# Altium PCB wenyaPCB.PcbDoc
Units mil, origin at the board's own origin, x right, y up, seen from the top; angles counter-clockwise.
Board outline 5529.59 x 3881.03 mil, 2 copper layers (Top Layer, Bottom Layer); 13 components, 15 nets, 63 pads, 79 vias.
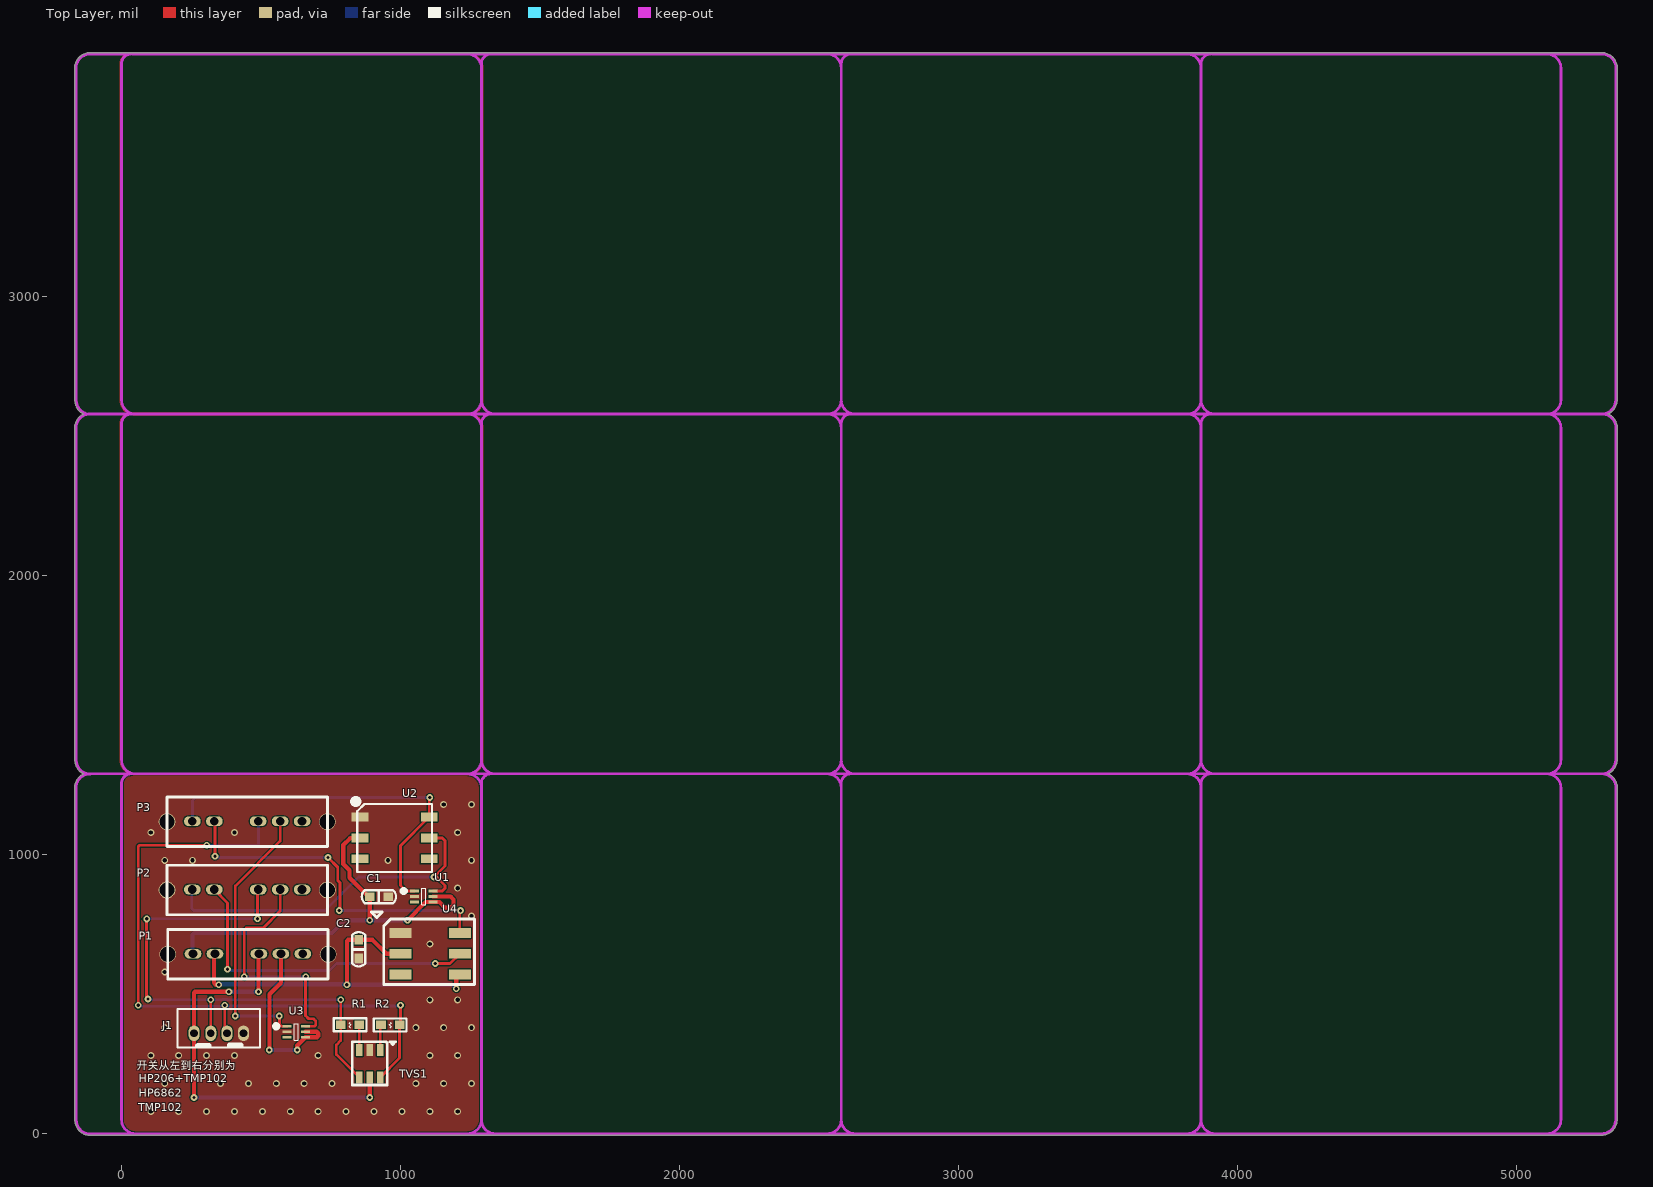
[diagram p0: Top Layer view]
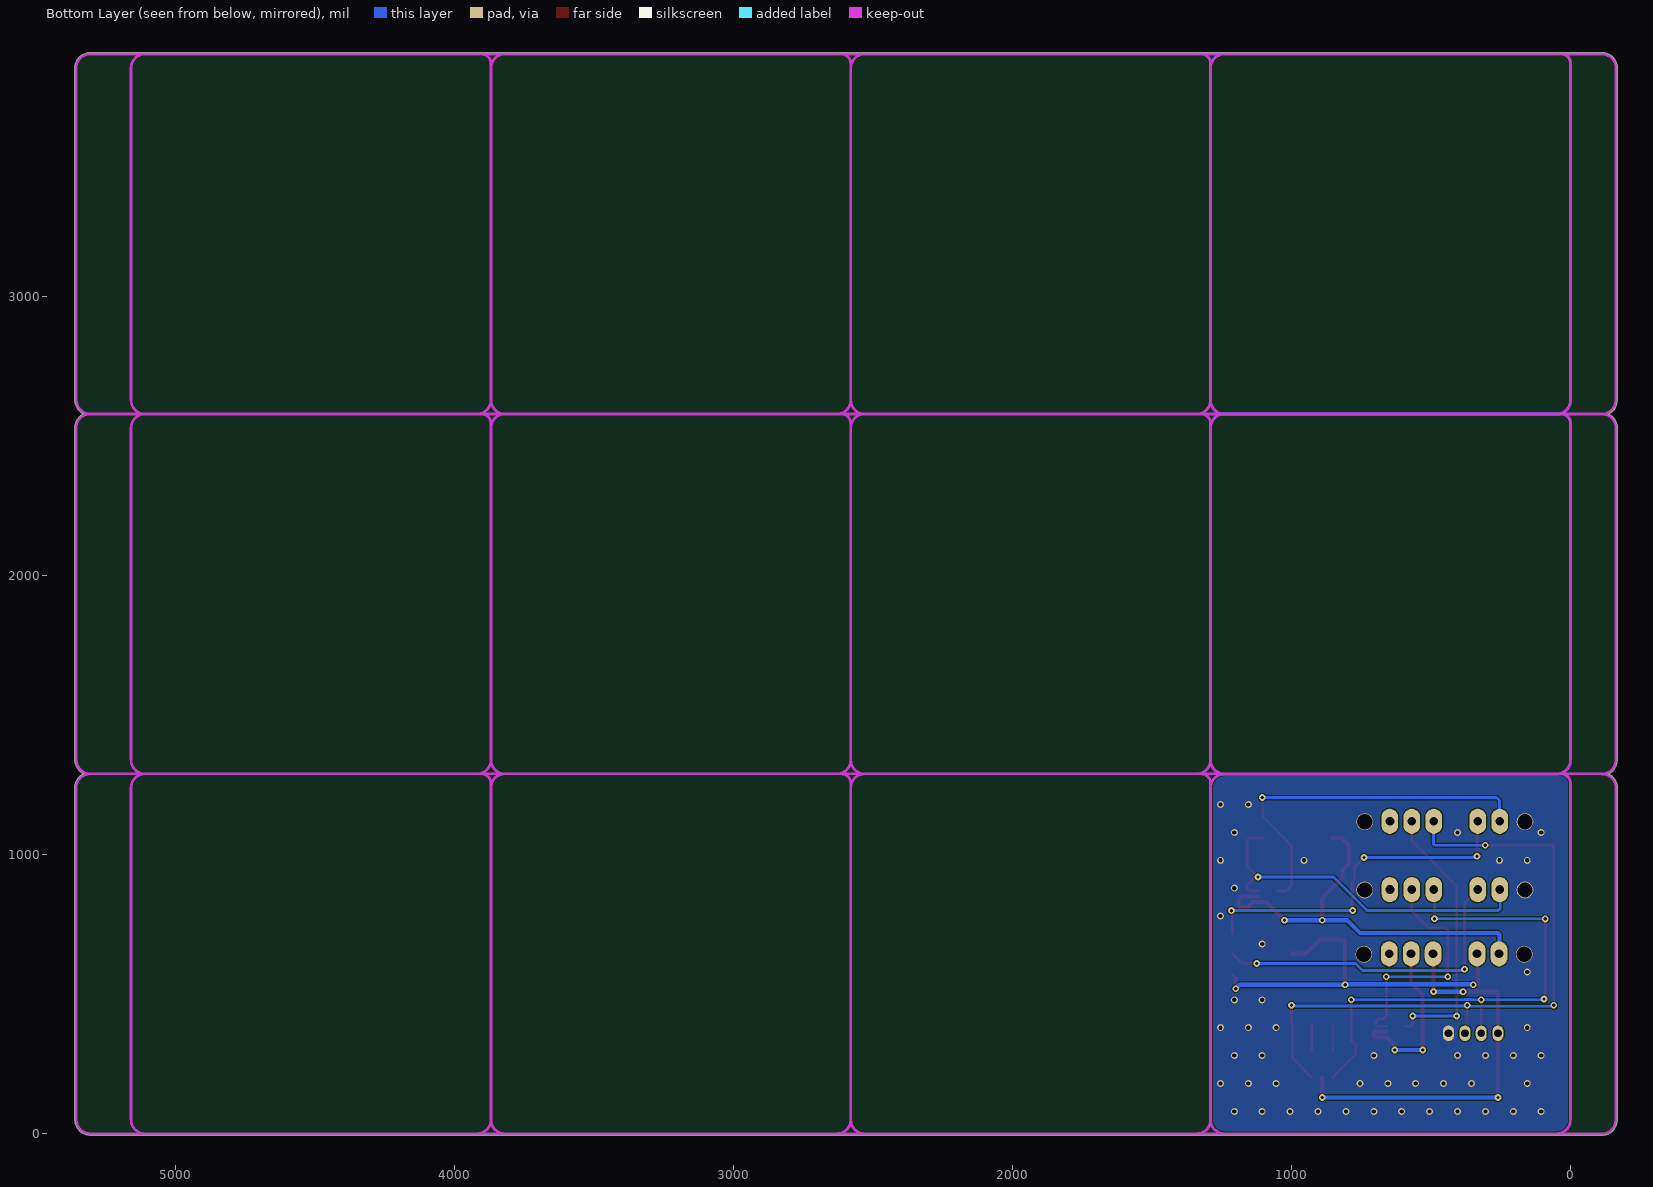
[diagram p1: Bottom Layer view, seen from below]

## Layer stack, top to bottom
Top Solder: solder mask 0.4, Solder Resist, Dk 3.5
Top Layer: signal copper 1.4
Dielectric 1: dielectric 12.6, FR-4, Dk 4.8
Bottom Layer: signal copper 1.4
Bottom Solder: solder mask 0.4, Solder Resist, Dk 3.5

## Board outline
-167.72,49 -167.72,1240 cw(c-162.71,1240) -167.72,1240.09 cw(c-112.71,1240) -136.36,1289.67 cw(c-112,1339) -166.95,1336.32 cw(c-162.71,1339) -167.72,1339 -167.72,2530 cw(c-162.71,2530) -167.72,2530.09 cw(c-112.71,2530) -136.36,2579.67 cw(c-112,2629) -166.95,2626.32 cw(c-162.71,2629) -167.72,2629 -167.72,3820 cw(c-162.71,3820) -167.72,3820.09 cw(c-112.71,3820) -112.71,3875.01 34.14,3875.01 cw(c34.14,3870) 37.07,3874.07 cw(c40,3870) 40,3875.01 1240,3875.01 cw(c1240,3870) 1240.06,3875.01 2530,3875.01 cw(c2530,3870) 2530.1,3875.01 3820,3875.01 cw(c3820,3870) 3820.08,3875.01 3904.14,3875.01 cw(c3904.14,3870) 3907.07,3874.07 cw(c3910,3870) 3910,3875.01 5306.7,3875.01 cw(c5306.85,3870) 5306.85,3875.01 cw(c5306.85,3820) 5361.86,3820 5361.86,2630 cw(c5356.85,2630) 5360.94,2627.09 cw(c5306,2630) 5329.37,2580.19 cw(c5306.85,2530) 5361.86,2530 5361.86,1340 cw(c5356.85,1340) 5360.94,1337.09 cw(c5306,1340) 5329.37,1290.19 cw(c5306.85,1240) 5361.86,1240 5361.86,50 cw(c5356.85,50) 5360.94,47.09 cw(c5306,50) 5306,-5.02 5110,-5.02 ccw(c5110,0) 5110.1,-5.02 5110,-5.02 ccw(c5110,50) 5110.33,-5.02 5110,-5.02 3920,-5.02 cw(c3920,0) 3919.9,-5.02 cw(c3920,0) 3919.89,-5.02 ccw(c3920,50) 3920,-5.02 2630,-5.02 cw(c2630,0) 2629.9,-5.02 cw(c2630,0) 2629.89,-5.02 ccw(c2630,50) 2630,-5.02 1340,-5.02 cw(c1340,0) 1339.94,-5.02 cw(c1340,0) 1339.9,-5.01 ccw(c1340,50) 1340,-5.01 1340,-5.02 ccw(c1340,0) 1340,-5.02 50,-5.02 cw(c50,0) 49.9,-5.01 cw(c50,0) 49.9,-5.01 ccw(c50,50) 50,-5.01 -108.99,-5.01 cw(c-112,-1) -112,-6.02 cw(c-112,49) -166.95,46.32 cw(c-162.71,49)

## Design rules (kind name [scope] priority, off if disabled: settings)
Clearance [All] p1: gap=4 ignorepadtopadclearanceinfootprint=TRUE
MinimumSolderMaskSliver [All] p1: minsoldermaskwidth=1
PlaneClearance [All] p1: clearance=8
PlaneConnect [All] p1: planeconnectstyle=Direct reliefexpansion=20 reliefentries=4 reliefconductorwidth=10 reliefairgap=10
PolygonConnect [All] p1: connectstyle=Direct reliefconductorwidth=10 reliefentries=4 polygonreliefangle="90 Angle" airgapwidth=10
RoutingVias [All] p1: holewidth=12 width=24 viastyle="Through Hole" minholewidth=12 minwidth=24 maxholewidth=12 maxwidth=24
SilkToSilkClearance [All] p1: silktosilkclearance=2
SilkToSolderMaskClearance [IsPad] p1: minsilkscreentomaskgap=0 clearancetoexposedcopper=TRUE
SolderMaskExpansion [IsVia] p1: expansion=4
Width vcc [InNet('VCC')] p1: maxlimit=15 minlimit=15 preferedwidth=15
Width [All] p2: maxlimit=15 minlimit=10 preferedwidth=10
25 further rules are at their usual default settings.

## Classes and differential pairs
component class wx: C1 C2 J1 P1 P3 R1 R2 TVS1 U1 U2 U3 U4

## Components (designator, comment, footprint, x,y, rotation, side; value= is the part's Value field where it differs from the comment)
C1 "0.1u" C0603 890,850 r0 top
C2 "100nF/50V" CAP0603 850,628.49 r90 top
J1 "Header 4" HDX4-L 348.74,360 r90 top
P1 "SS-14D07G2" "PCBComponent_1 - duplicate" 740.55,555 r90 top
P2 "SS-14D07G2" "PCBComponent_1 - duplicate" 738.03,785 r90 top
P3 "SS-14D07G2" "PCBComponent_1 - duplicate" 738.03,1030 r90 top
R1 "1K 5%" RES0603 852.6,390 r180 top
R2 "1K 5%" RES0603 930,390 r0 top
TVS1 "TVS" ESD 927.4,300 r180 top
U1 "tmp102" SO-P6 1051.97,869.68 r0 top
U2 "." HP206C 978.94,1060.2 r0 top
U3 "tmp102" SO-P6 595,385 r0 top
U4 "HP6862I" huapu 1106.3,645.2 r270 top

## Footprints (in the part's own frame and the unit in brackets; to place one, negate y for a bottom-side part, rotate by r counter-clockwise, add the part's x,y. Pads: shape width x height; smd on the part's side, far side on the other; paste and mask are expansions set on the pad)
C0603 [mil]
  rect 35x31 smd: 1(-0.49,0) 2(66.51,0)
  silkscreen extent -29,-24 94,23, body extent 1,-15 72,15, height 20
CAP0603 [mil]
  rect 35x31 smd: 1(-0.49,0) 2(66.51,0)
  silkscreen extent -29,-24 94,23, body extent 1,-15 72,15, height 20
ESD [mm]
  rect 0.6x1.1 smd: 1(0,0) 2(0.95,0) 3(1.9,0) 4(1.9,2.5) 5(0.95,2.5) 6(0,2.5)
  silkscreen extent -1.4,-0.76 2.54,3.18
HDX4-L [mm]
  oval 1.4x1 hole 0.7: 1(0,-2.25) 2(0,-0.75) 3(0,0.73) 4(0,2.25)
  silkscreen extent -1.3,-3.75 2.2,3.75
HP206C [mm]
  rect 1.52x0.8 smd: 1(-3.148,1.9) 2(-3.148,0) 3(-3.148,-1.9) 4(3.148,-1.9) 5(3.148,0) 6(3.148,1.9)
  silkscreen extent -3.56,-3.1 3.4,3.3
huapu [mm]
  rect 0.9x2 smd: 1(-1.9,-2.7) 2(0,-2.7) 3(1.9,-2.7) 4(1.9,2.7) 5(0,2.7) 6(-1.9,2.7)
  silkscreen extent -3.8,-5.37 2.8,4.03
"PCBComponent_1 - duplicate" [mil]
  oval 35x60 / inner round 60 / far side oval 90x60 hole 31.5: 1(90,484.25) 2(90,405.51) 3(90,248.03) 4(90,169.29) 5(90,90.55)
  round 60 hole 55.12: 6(88.58,574.8) 7(88.58,0)
  silkscreen extent 0,0 177,575
RES0603 [mil]
  rect 35x31 smd: 1(0,0) 2(67,0)
  silkscreen extent -26,-24 92,23, body extent 0,-15 71,15, height 12
SO-P6 [mm]
  rect 0.8x0.25 smd: 1(-0.05,0) 2(-0.05,-0.5) 3(-0.05,-1) 4(1.65,-1) 5(1.65,-0.5) 6(1.65,0)
  silkscreen extent -1.04,-1.25 0.98,0.25

## Part data
C1: library part CAP, "Capacitor"
C2: library part 101020103-0021, "104pF,50 V,±10%,0603,国巨,CC0603KRX7R9BB104", Part Name=0603贴片电容, ID=3, Part Number=101020103-0021, SMD/DIP=SMD
J1: "Header, 4-Pin", LatestRevisionDate=17-Jul-2002, LatestRevisionNote="Re-released for DXP Platform.", Publisher="Altium Limited"
R1 R2: library part 101010103-0008, "1K,±5%,1/10W,0603,国巨,RC0603JR-071KL", Part Name=0603贴片电阻, ID=10, Part Number=101010103-0008, SMD/DIP=SMD
U1 U3: library part tem102
U2: library part HP206C

## Via types
v1: diameter 25, hole 15, Top Layer to Bottom Layer, tented both sides, 47 vias
v2: diameter 24, hole 12, Top Layer to Bottom Layer, tented both sides, 32 vias

## Nets (pads, with @x,y where several pads share a name; then routed paths per layer and width w, separated by ;. In a path a pad name is that pad's centre, name@x,y a point inside that pad or via, vN(x,y) a via of type N, cw(c..) or ccw(c..) an arc to the next point about the centre after c; other vN are vias at no path point)
GND: C1.2 C2.1 J1.1 P1.6 P1.7 P2.6 P2.7 P3.6 P3.7 TVS1.2 U1.2 U2.1 U3.2 U4.1
  other v1: 105,80 205,80 305,80 405,80 505,80 605,80 705,80 805,80 905,80 1005,80 1105,80 1205,80 155,180 355,180 455,180 555,180 655,180 755,180 1055,180 1155,180 1255,180 105,280 205,280 305,280 405,280 705,280 1105,280 1205,280 155,380 1055,380 1155,380 1255,380 1105,480 1205,480 155,580 1105,680 1255,780 1205,880 155,980 255,980 955,980 1255,980 105,1080 405,1080 1205,1080 1155,1180 1255,1180
HP_POW: C2.2 P1.2 U4.2 U4.4 | length 1412.3
  Top Layer w10: P1.2@330,639.96 P1.2 ; U4.4@1200,557.8 U4.4
  Top Layer w15: P1.2@330,639.96 331,638.96 331,541 338,534 v2(349,534) ; v2(808,534) 808,691 812,695 C2.2 900,695 949.8,645.2 U4.2 ; v2(1200,520) U4.4@1200,557.8
  Bottom Layer w15: v2(349,534) 350.5,535.5 806.5,535.5 v2(808,534) 1186,534 v2(1200,520)
NetR1_1: R1.1 TVS1.3 | length 90
  Top Layer w10: TVS1.3 R1.1
NetR2_1: R2.1 TVS1.1 | length 91.1
  Top Layer w10: TVS1.1 927.4,387.4 R2.1
POW1: P1.4 U3.4 U3.5 | length 624.2
  Top Layer w15: v2(530,300) 530,500 571.26,541.26 P1.4 ; v2(630,300) 630,315.67 U3.4 700.63,345.63 705,350 705,360 699.68,365.32 U3.5
  Bottom Layer w15: v2(530,300) v2(630,300)
SCL: J1.2 P3.3 R2.2 TVS1.6 | length 2422.7
  Top Layer w10: v2(60,460) 60,1029 65,1034 v2(306,1034) ; v2(370,460) 370,368.27 J1.2 ; TVS1.6 997,271.17 R2.2 1000,393 v2(1000,460)
  Bottom Layer w10: v2(60,460) 63,457 367,457 v2(370,460) 372.6,457.4 997.4,457.4 v2(1000,460) ; v2(306,1034) 487,1034 491,1038 491,1119 P3.3
SCL1: P3.2 U4.6 | length 1258.1
  Top Layer w10: P3.2 335,1117.52 v2(335,995) ; v2(740,990) 775,955 775,907.78 783.03,899.75 783.03,803.03 v2(780,800) ; U4.6 1212.6,797.4 v2(1215,799.8)
  Bottom Layer w10: v2(335,995) 340,990 v2(740,990) ; v2(780,800) 780.2,799.8 v2(1215,799.8)
SCL2: P3.4 U3.1 | length 986.2
  Top Layer w10: v2(408,422) 408,888 568.74,1048.74 P3.4 ; v2@566,425 v2(566,422) 566,393 574,385 U3.1
  Bottom Layer w10: v2(408,422) 563,422 v2@566,425
SDA: J1.3 P2.3 R1.2 TVS1.4 | length 1931.3
  Top Layer w10: v2(90,770) 90,484 91,483 v2(95,483) ; J1.3 v2(320,480) ; v2(487.22,770.22) 487.22,872.22 P2.3 ; v2(785.6,480.4) R1.2 785.6,333.6 770,318 770,284.17 TVS1.4
  Bottom Layer w10: v2@90.22,770.22 v2(487.22,770.22) ; v2(95,483) 95,481 96,480 v2(320,480) ; v2@322,481 322.6,480.4 360.7,480.4 361.3,481 378.7,481 379.3,480.4 v2(785.6,480.4) ; P2.3 P2.3@494,871
SDA1: P2.2 U4.5 | length 1164.6
  Top Layer w10: P2.2 380.04,827.48 v2(380,590) v2(380,590) ; v2(1125,610) 1177.4,610 U4.5
  Bottom Layer w10: v2(380,590) 385,585 456.72,585 457.01,585.3 473.58,585.3 473.88,585 745.61,585 770.61,610 v2(1125,610)
SDA2: P2.4 U3.6 | length 856.4
  Top Layer w10: v2(440,563) 440,730 448,738 508,738 568.74,798.74 P2.4 ; U3.6 691,385 696,390 696,404 688.01,411.99 671.18,411.99 660,423.17 v2(660,563)
  Bottom Layer w10: v2(440,563) v2(660,563)
VCC: J1.4 P1.3 TVS1.5 | length 1447.3
  Top Layer w15: v2(260,130) 260,359.84 J1.4 260.16,505.16 264,509 v2(385,509) ; v2(491,509) 491,643.48 P1.3 ; v2(890,130) TVS1.5
  Bottom Layer w15: v2(260,130) v2(890,130) ; v2@386,510 v2(385,509) v2(491,509)
WY_CLK: P3.1 U1.1 U2.6 | length 1346.6
  Top Layer w10: U1.1 1020.32,869.68 1000,890 1000,1032.13 U2.6 1102.87,1202.87 v2(1105,1205)
  Bottom Layer w10: P3.1 254,1120.22 254,1194 265,1205 v2(1105,1205)
WY_POW: C1.1 P1.1 U1.4 U1.5 U2.2 | length 1557.9
  Top Layer w10: C1.1 890,849.51 C1.1@890,845
  Top Layer w15: P1.1 P1.1@260,641.3 ; U2.2 820.2,1060.2 795,1035 795,966.82 817.5,944.32 817.5,917.5 890,845 v2(890,765) ; v2(1025,765) 1090.31,830.31 U1.4 1139.69,830.31 1160,810 1180,810 1190,820 1190,840 1180,850 U1.5
  Bottom Layer w15: P1.1@260,641.3 P1.1 255,646.3 255,714 261,720 755,720 800,765 v2(890,765) v2(1025,765)
WY_SDA: P2.1 U1.6 U2.5 | length 1307
  Top Layer w10: U2.5 1149.8,1060.2 1160,1050 1160,960 v2(1120,920) 1130,920 1160,890 1160,880 1149.68,869.68 U1.6
  Bottom Layer w10: P2.1 252,873.22 252,807 259,800 730,800 850,920 v2(1120,920)
pads on no net: P1.5 P2.5 P3.5 U1.3 U2.3 U2.4 U3.3 U4.3

## Polygon pours and split planes (outlines as drawn)
GND on Top Layer "Top Layer-No Net" (solid, remove dead copper, pour order 0): -5.02,50 -5.02,1255.86 cw(c0,1255.86) -5.01,1255.94 cw(c34.14,1255.86) 34.14,1295.01 cw(c34.14,1290) 37.07,1294.07 cw(c40,1290) 40,1295.01 1240,1295.01 cw(c1240,1240) 1295.01,1240 1295.01,50 cw(c1290,50) 1295.01,49.92 ccw(c1240.01,50.03) 1295.01,50 1295.01,49.92 cw(c1240,50) 1240,-5.02 50,-5.02 cw(c50,0) 49.9,-5.01 ccw(c50,49.98) 50,-5.01 49.9,-5.01 cw(c50,50)
no net on Top Layer "Top Layer-No Net" (solid, remove dead copper, pour order 6): -5.01,1340 -5.01,2545.86 cw(c0,2545.86) -5.01,2545.94 cw(c34.14,2545.86) 34.14,2585.01 cw(c34.14,2580) 37.07,2584.07 cw(c40,2580) 40,2585.01 1240,2585.01 cw(c1240,2530) 1295.02,2530 1295.02,1340 cw(c1290,1340) 1295.01,1339.92 ccw(c1240.01,1340.03) 1295.01,1340 1295.01,1339.92 cw(c1240,1340) 1240,1284.98 50,1284.98 cw(c50,1290) 49.9,1284.99 ccw(c50,1339.98) 50,1284.99 49.9,1284.99 cw(c50,1340)
no net on Top Layer "Top Layer-No Net" (solid, remove dead copper, pour order 10): -5.01,2630 -5.01,3835.86 cw(c0,3835.86) -5.01,3835.94 cw(c34.14,3835.86) 34.14,3875.01 cw(c34.14,3870) 37.07,3874.07 cw(c40,3870) 40,3875.01 1240,3875.01 cw(c1240,3820) 1295.02,3820 1295.02,2630 cw(c1290,2630) 1295.02,2629.92 ccw(c1240.01,2630.03) 1295.02,2630 1295.02,2629.92 cw(c1240,2630) 1240,2574.98 50,2574.98 cw(c50,2580) 49.9,2574.99 ccw(c50,2629.98) 50,2574.99 49.9,2574.99 cw(c50,2630)
GND on Bottom Layer "Top Layer-No Net1" (solid, remove dead copper, pour order 1): -5.02,50 -5.02,1255.86 cw(c0,1255.86) -5.01,1255.94 cw(c34.14,1255.86) 34.14,1295.01 cw(c34.14,1290) 37.07,1294.07 cw(c40,1290) 40,1295.01 1240,1295.01 cw(c1240,1240) 1295.01,1240 1295.01,50 cw(c1290,50) 1295.01,49.92 ccw(c1240.01,50.03) 1295.01,50 1295.01,49.92 cw(c1240,50) 1240,-5.02 50,-5.02 cw(c50,0) 49.9,-5.01 ccw(c50,49.98) 50,-5.01 49.9,-5.01 cw(c50,50)
no net on Bottom Layer "Top Layer-No Net1" (solid, remove dead copper, pour order 8): -5.01,1340 -5.01,2545.86 cw(c0,2545.86) -5.01,2545.94 cw(c34.14,2545.86) 34.14,2585.01 cw(c34.14,2580) 37.07,2584.07 cw(c40,2580) 40,2585.01 1240,2585.01 cw(c1240,2530) 1295.02,2530 1295.02,1340 cw(c1290,1340) 1295.01,1339.92 ccw(c1240.01,1340.03) 1295.01,1340 1295.01,1339.92 cw(c1240,1340) 1240,1284.98 50,1284.98 cw(c50,1290) 49.9,1284.99 ccw(c50,1339.98) 50,1284.99 49.9,1284.99 cw(c50,1340)
no net on Bottom Layer "Top Layer-No Net1" (solid, remove dead copper, pour order 12): -5.01,2630 -5.01,3835.86 cw(c0,3835.86) -5.01,3835.94 cw(c34.14,3835.86) 34.14,3875.01 cw(c34.14,3870) 37.07,3874.07 cw(c40,3870) 40,3875.01 1240,3875.01 cw(c1240,3820) 1295.02,3820 1295.02,2630 cw(c1290,2630) 1295.02,2629.92 ccw(c1240.01,2630.03) 1295.02,2630 1295.02,2629.92 cw(c1240,2630) 1240,2574.98 50,2574.98 cw(c50,2580) 49.9,2574.99 ccw(c50,2629.98) 50,2574.99 49.9,2574.99 cw(c50,2630)

## Keep-outs
Keep-Out Layer:
  lines w10: -162.71,49 -162.71,1240 cw(c-112.71,1240) -112.71,1290 34.14,1290 ccw(c34.14,1255.86) 0,1255.86 0,50 ccw(c50,50) 50,0 ; -162.71,1339 -162.71,2530 cw(c-112.71,2530) -112.71,2580 34.14,2580 ccw(c34.14,2545.86) 0,2545.86 0,1340 ccw(c50,1340) 50,1290 1240,1290 ; -162.71,2629 -162.71,3820 cw(c-112.71,3820) -112.71,3870 34.14,3870 ccw(c34.14,3835.86) 0,3835.86 0,2630 ccw(c50,2630) 50,2580 ; -162,49 ccw(c-112,49) -112,-1 ; -162,1339 ccw(c-112,1339) -112,1289 ; -162,2629 ccw(c-112,2629) -112,2579 ; -112,0 -96.85,0 50,0 ; -112,1290 -96.85,1290 ; -112,2580 -96.85,2580 50,2580 ; 40,1290 1240,1290 ; 40,2580 1240,2580 ; 40,3870 1240,3870 ; 1324.14,1290 ccw(c1324.14,1255.86) 1290,1255.86 1290,50 ; 1324.14,2580 ccw(c1324.14,2545.86) 1290,2545.86 1290,1340 ; 1324.14,3870 ccw(c1324.14,3835.86) 1290,3835.86 1290,2630 ; 2614.14,1290 ccw(c2614.14,1255.86) 2580,1255.86 2580,50 ; 2614.14,2580 ccw(c2614.14,2545.86) 2580,2545.86 2580,1340 ; 2614.14,3870 ccw(c2614.14,3835.86) 2580,3835.86 2580,2630 ; 3910,1290 5110,1290 ; 3910,2580 5110,2580 ; 3910,3870 5110,3870 ; 5356,50 cw(c5306,50) 5306,0 5160,0 5110,0 ; 5356,1340 cw(c5306,1340) 5306,1290 5160,1290 ; 5356,2630 cw(c5306,2630) 5306,2580 5160,2580 ; 5356.85,50 5356.85,1240 ccw(c5306.85,1240) 5306.85,1290 5160,1290 ; 5356.85,1340 5356.85,2530 ccw(c5306.85,2530) 5306.85,2580 5160,2580 ; 5356.85,2630 5356.85,3820 ccw(c5306.85,3820) 5306.85,3870 5160,3870 5110,3870 ; 50,0 1240,0 ; 50,2580 1240,2580 ; 1240,0 ccw(c1240,50) 1290,50 ; 1240,0 1340,0 ; 1240,1290 cw(c1240,1240) 1290,1240 1290,50 ; 1240,1290 ccw(c1240,1340) 1290,1340 ; 1240,1290 1330,1290 2530,1290 ; 1240,1290 1340,1290 ; 1240,2580 cw(c1240,2530) 1290,2530 1290,1340 ; 1240,2580 ccw(c1240,2630) 1290,2630 ; 1240,2580 1330,2580 2530,2580 ; 1240,2580 1340,2580 ; 1240,3870 cw(c1240,3820) 1290,3820 1290,2630 ; 1240,3870 1330,3870 2530,3870 ; 1290,50 ccw(c1340,50) 1340,0 ; 1290,1340 ccw(c1340,1340) 1340,1290 ; 1290,2630 ccw(c1340,2630) 1340,2580 ; 1340,0 2530,0 ; 1340,1290 2530,1290 ; 1340,2580 2530,2580 ; 2530,0 ccw(c2530,50) 2580,50 ; 2530,0 2630,0 ; 2530,1290 cw(c2530,1240) 2580,1240 2580,50 ; 2530,1290 ccw(c2530,1340) 2580,1340 ; 2530,1290 2620,1290 3820,1290 ; 2530,1290 2630,1290 ; 2530,2580 cw(c2530,2530) 2580,2530 2580,1340 ; 2530,2580 ccw(c2530,2630) 2580,2630 ; 2530,2580 2620,2580 3820,2580 ; 2530,2580 2630,2580 ; 2530,3870 cw(c2530,3820) 2580,3820 2580,2630 ; 2530,3870 2620,3870 3820,3870 ; 2580,50 ccw(c2630,50) 2630,0 ; 2580,1340 ccw(c2630,1340) 2630,1290 ; 2580,2630 ccw(c2630,2630) 2630,2580 ; 2630,0 3820,0 ; 2630,1290 3820,1290 ; 2630,2580 3820,2580 ; 3820,0 ccw(c3820,50) 3870,50 ; 3820,0 3920,0 ; 3820,1290 cw(c3820,1240) 3870,1240 3870,50 ; 3820,1290 ccw(c3820,1340) 3870,1340 ; 3820,1290 3904.14,1290 ccw(c3904.14,1255.86) 3870,1255.86 3870,50 ; 3820,1290 3920,1290 ; 3820,2580 cw(c3820,2530) 3870,2530 3870,1340 ; 3820,2580 ccw(c3820,2630) 3870,2630 ; 3820,2580 3904.14,2580 ccw(c3904.14,2545.86) 3870,2545.86 3870,1340 ; 3820,2580 3920,2580 ; 3820,3870 cw(c3820,3820) 3870,3820 3870,2630 ; 3820,3870 3904.14,3870 ccw(c3904.14,3835.86) 3870,3835.86 3870,2630 ; 3870,50 ccw(c3920,50) 3920,0 ; 3870,1340 ccw(c3920,1340) 3920,1290 ; 3870,2630 ccw(c3920,2630) 3920,2580 ; 3920,0 5110,0 ; 3920,1290 5110,1290 ; 3920,2580 5110,2580 ; 5110,0 ccw(c5110,50) 5160,50 5160,1240 ccw(c5110,1240) 5110,1290 ; 5110,1290 ccw(c5110,1340) 5160,1340 5160,2530 ccw(c5110,2530) 5110,2580 ; 5110,1290 5160,1290 ; 5110,1290 5160,1290 ; 5110,2580 ccw(c5110,2630) 5160,2630 5160,3820 ccw(c5110,3820) 5110,3870 ; 5110,2580 5160,2580 ; 5110,2580 5160,2580

## Silkscreen, mask and mechanical layers (free items; w line width, h text height)
Top Overlay:
  text "开关从左到右分别为" at 55,220 h50
  text "HP206+TMP102" at 61,174 h50
  text "HP6862" at 61,122 h50
  text "TMP102" at 60,70 h50
Mechanical 1:
  lines w10: 34.14,1290 50,1290 ; 34.14,2580 50,2580 ; 34.14,3870 50,3870